# EAGLE board shield (EAGLE 6.4)
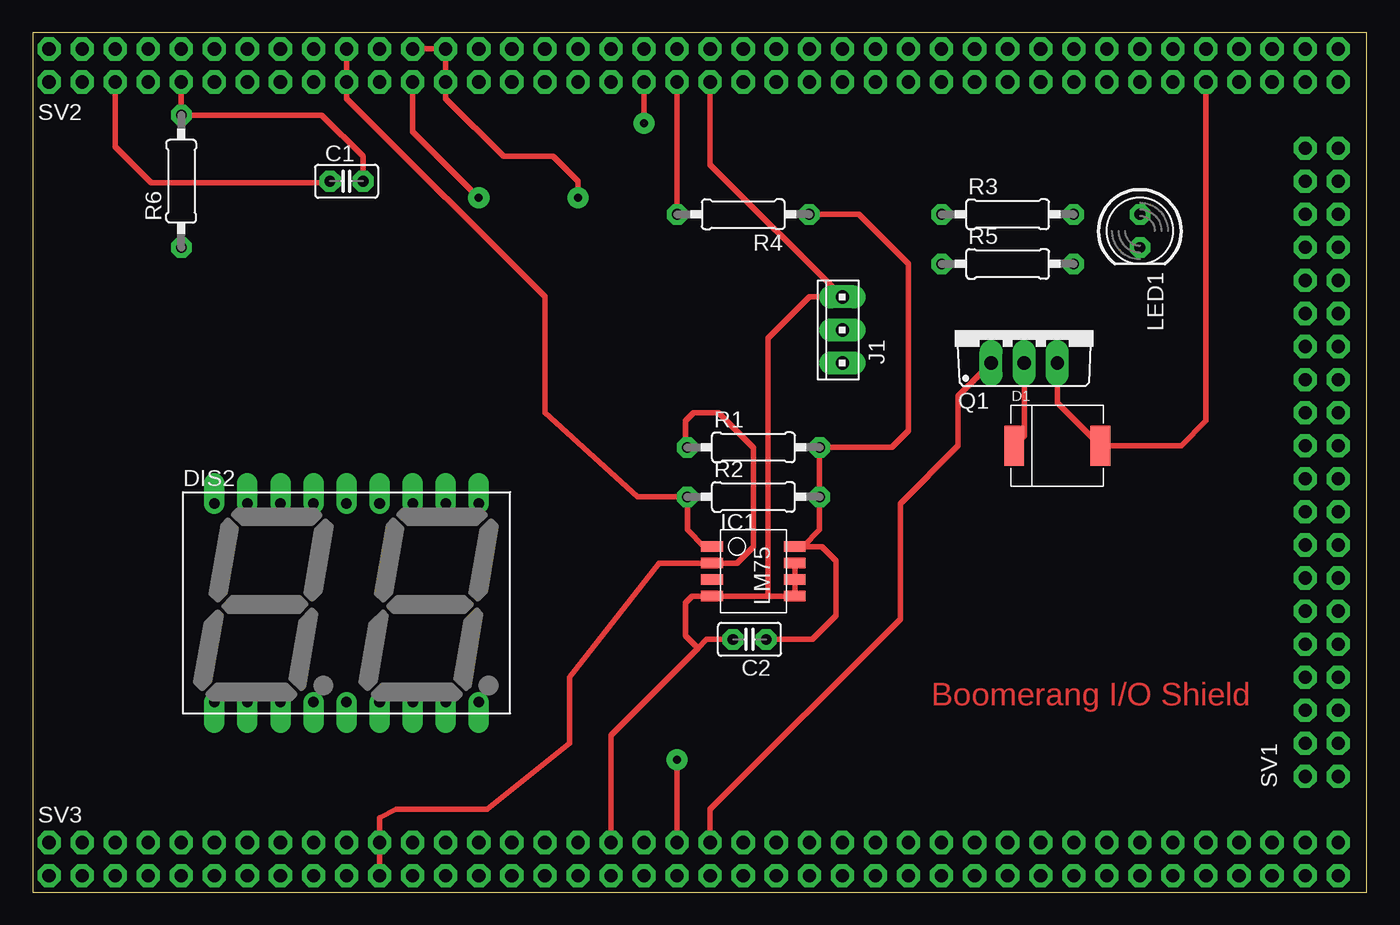
[diagram p0: board, top side]
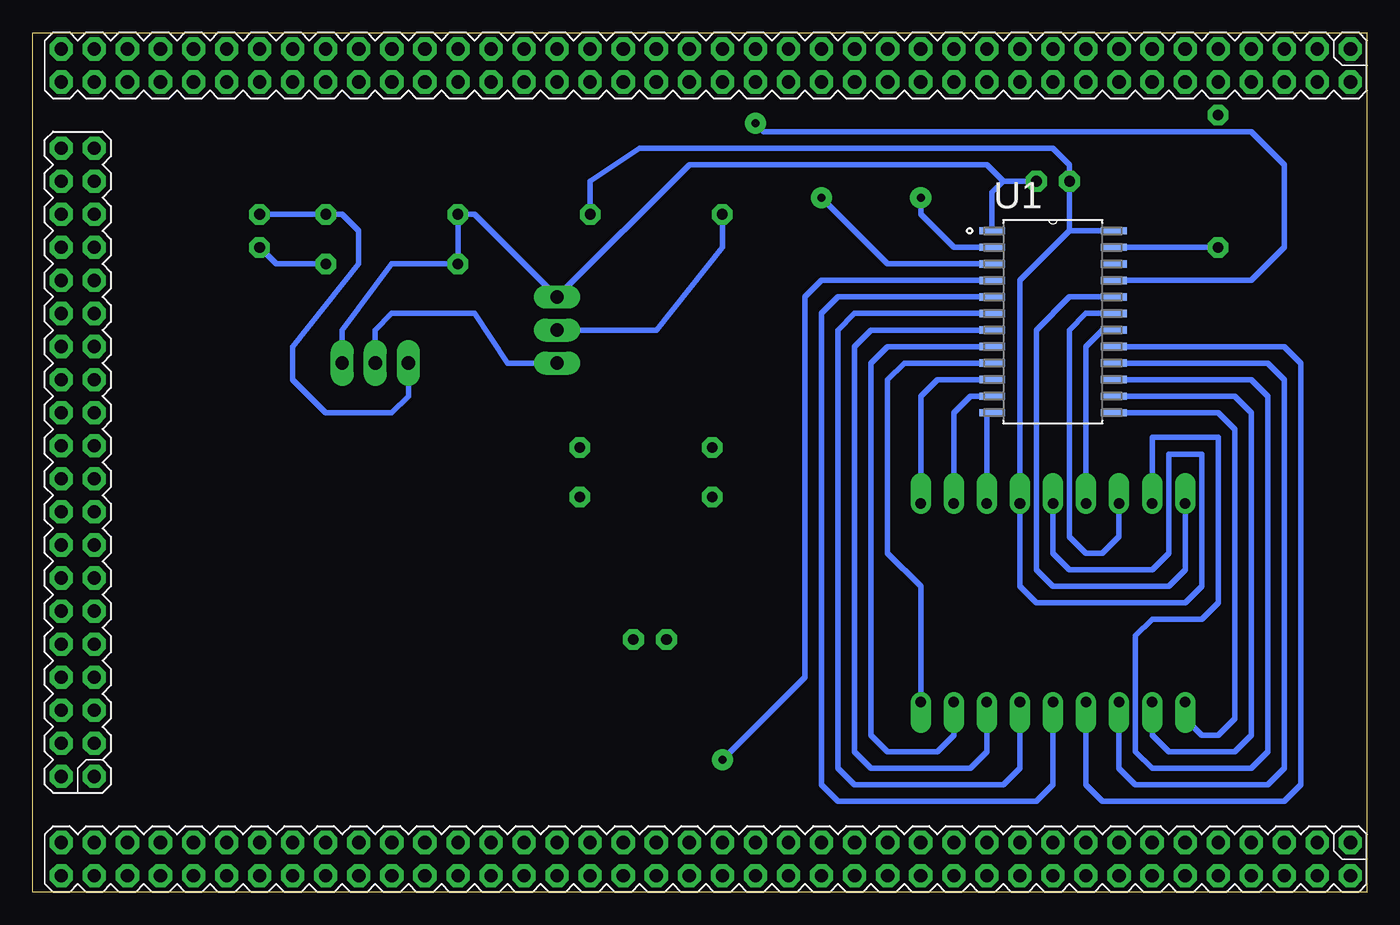
[diagram p1: board, bottom side, seen from below]

Size 102.54 x 66.03 mm. Coordinates in mm from the lower left corner, seen from the top.
Outline: 0,0 102.54,0 102.54,66.03 0,66.03 0,0
Copper layers (1*16): Top 0.035mm / dielectric 1.5mm / Bottom 0.035mm
Design rules "default *": minimum track width 10mil, minimum drill 10mil, track to track 12mil, track to pad 12mil, pad to pad 12mil, via to via 12mil, smd to smd 8mil, copper to edge 12mil, drill to drill 0.6mm, minimum pad ring 15mil, minimum via ring 20mil, stop-mask expansion 4mil, vias tented up to drill 0mil, thermal gap 10mil

## Footprints (pad centres in the part's own frame; a part is rotated, then mirrored left to right if it is on the bottom)
C2.5-2 = drill 0.813 pad 1.6 octagon: 1 -1.27,0; 2 1.27,0
DO214AB = smd 1.52 x 3.07: A 3.305,0; K -3.305,0
HDSP-R = drill 0.813 pad 1.016 offset: 1 -10.16,-7.62; 2 -7.62,-7.62; 3 -5.08,-7.62; 4 -2.54,-7.62; 5 0,-7.62; 6 2.54,-7.62; 7 5.08,-7.62; 8 7.62,-7.62; 9 10.16,-7.62; 10 10.16,7.62; 11 7.62,7.62; 12 5.08,7.62; 13 2.54,7.62; 14 0,7.62; 15 -2.54,7.62; 16 -5.08,7.62; 17 -7.62,7.62; 18 -10.16,7.62
SO8_LM75 = smd 0.813 x 1.676: 1 -1.27,-3.175; 2 0,-3.175; 3 1.27,-3.175; 4 2.54,-3.175; 5 2.54,3.175; 6 1.27,3.175; 7 0,3.175; 8 -1.27,3.175
10X03MTA = drill 1.016 long: 1 2.54,0; 2 0,0; 3 -2.54,0
LED5MM = drill 0.813 octagon: A -1.27,0; K 1.27,0
TO220BV = drill 1.016 long: D 0,-2.54; G -2.54,-2.54; S 2.54,-2.54
0207/10 = drill 0.813 octagon: 1 -5.08,0; 2 5.08,0
MA20-2 = drill 1.016 octagon: 1 -24.13,-1.27; 2 -24.13,1.27; 3 -21.59,-1.27; 4 -21.59,1.27; 5 -19.05,-1.27; 6 -19.05,1.27; 7 -16.51,-1.27; 8 -16.51,1.27; 9 -13.97,-1.27; 10 -13.97,1.27; 11 -11.43,-1.27; 12 -11.43,1.27; 13 -8.89,-1.27; 14 -8.89,1.27; 15 -6.35,-1.27; 16 -6.35,1.27; 17 -3.81,-1.27; 18 -3.81,1.27; 19 -1.27,-1.27; 20 -1.27,1.27; 21 1.27,-1.27; 22 1.27,1.27; 23 3.81,-1.27; 24 3.81,1.27; 25 6.35,-1.27; 26 6.35,1.27; 27 8.89,-1.27; 28 8.89,1.27; 29 11.43,-1.27; 30 11.43,1.27; 31 13.97,-1.27; 32 13.97,1.27; 33 16.51,-1.27; 34 16.51,1.27; 35 19.05,-1.27; 36 19.05,1.27; 37 21.59,-1.27; 38 21.59,1.27; 39 24.13,-1.27; 40 24.13,1.27
MA40-2 = drill 1.016 octagon: 1 -24.13,-1.27; 2 -24.13,1.27; 3 -21.59,-1.27; 4 -21.59,1.27; 5 -19.05,-1.27; 6 -19.05,1.27; 7 -16.51,-1.27; 8 -16.51,1.27; 9 -13.97,-1.27; 10 -13.97,1.27; 11 -11.43,-1.27; 12 -11.43,1.27; 13 -8.89,-1.27; 14 -8.89,1.27; 15 -6.35,-1.27; 16 -6.35,1.27; 17 -3.81,-1.27; 18 -3.81,1.27; 19 -1.27,-1.27; 20 -1.27,1.27; 21 1.27,-1.27; 22 1.27,1.27; 23 3.81,-1.27; 24 3.81,1.27; 25 6.35,-1.27; 26 6.35,1.27; 27 8.89,-1.27; 28 8.89,1.27; 29 11.43,-1.27; 30 11.43,1.27; 31 13.97,-1.27; 32 13.97,1.27; 33 16.51,-1.27; 34 16.51,1.27; 35 19.05,-1.27; 36 19.05,1.27; 37 21.59,-1.27; 38 21.59,1.27; 39 24.13,-1.27; 40 24.13,1.27; 41 26.67,-1.27; 42 26.67,1.27; 43 29.21,-1.27; 44 29.21,1.27; 45 31.75,-1.27; 46 31.75,1.27; 47 34.29,-1.27; 48 34.29,1.27; 49 36.83,-1.27; 50 36.83,1.27; 51 39.37,-1.27; 52 39.37,1.27; 53 41.91,-1.27; 54 41.91,1.27; 55 44.45,-1.27; 56 44.45,1.27; 57 46.99,-1.27; 58 46.99,1.27; 59 49.53,-1.27; 60 49.53,1.27; 61 52.07,-1.27; 62 52.07,1.27; 63 54.61,-1.27; 64 54.61,1.27; 65 57.15,-1.27; 66 57.15,1.27; 67 59.69,-1.27; 68 59.69,1.27; 69 62.23,-1.27; 70 62.23,1.27; 71 64.77,-1.27; 72 64.77,1.27; 73 67.31,-1.27; 74 67.31,1.27; 75 69.85,-1.27; 76 69.85,1.27; 77 72.39,-1.27; 78 72.39,1.27; 79 74.93,-1.27; 80 74.93,1.27
SOIC127P1030X265-24N = smd 1.981 x 0.559: 1 -4.674,6.985; 2 -4.674,5.715; 3 -4.674,4.445; 4 -4.674,3.175; 5 -4.674,1.905; 6 -4.674,0.635; 7 -4.674,-0.635; 8 -4.674,-1.905; 9 -4.674,-3.175; 10 -4.674,-4.445; 11 -4.674,-5.715; 12 -4.674,-6.985; 13 4.674,-6.985; 14 4.674,-5.715; 15 4.674,-4.445; 16 4.674,-3.175; 17 4.674,-1.905; 18 4.674,-0.635; 19 4.674,0.635; 20 4.674,1.905; 21 4.674,3.175; 22 4.674,4.445; 23 4.674,5.715; 24 4.674,6.985

## Placement (x,y rotation side)
C1  100n  [C2.5-2]  24.13,54.61 0 top
C2  100n  [C2.5-2]  55.09,19.41 180 top
D1  1.5SMCJ33A  [DO214AB]  78.74,34.29 0 top
DIS2  HDSP-521E  [HDSP-R]  24.13,22.23 0 top
IC1  LM75  [SO8_LM75]  55.4,25.28 270 top
J1  [10X03MTA]  62.23,43.18 90 top
LED1  [LED5MM]  85.09,50.8 270 top
Q1  IPP114N03L  [TO220BV]  76.2,43.18 0 top
R1  10k  [0207/10]  55.4,34.17 0 top
R2  10k  [0207/10]  55.4,30.36 0 top
R3  10k  [0207/10]  74.93,52.07 0 top
R4  10k  [0207/10]  54.61,52.07 180 top
R5  330  [0207/10]  74.93,48.26 0 top
R6  330R  [0207/10]  11.43,54.61 90 top
SV1  [MA20-2]  99.06,33.02 90 bottom
SV2  [MA40-2]  25.4,63.5 180 bottom
SV3  [MA40-2]  25.4,2.54 180 bottom
U1  TLC5925IDWR  [SOIC127P1030X265-24N]  24.13,43.81 0 bottom

## Library data of the parts
C1 C2 = capacitor-wima
D1 = seb
DIS2 = display-hp; OC_FARNELL: unknown; OC_NEWARK: unknown
IC1 = lm75
J1 = con-amp
LED1 = led
Q1 = transistor-power
R1-R6 = rcl
SV1-SV3 = boomerang; OC_FARNELL: unknown; OC_NEWARK: unknown
U1 = Texas Instruments_By_element14_Batch_1; MPN: TLC5925IDWR; OC_FARNELL: 1858096; OC_NEWARK: 10R6961; PACKAGE: SOIC-24; SUPPLIER: Texas Instruments

## Nets
+3V3: C1.1 C2.1 DIS2.13 DIS2.14 IC1.8 R1.2 R2.2 R4.1 SV2.6 U1.24
GND: C1.2 C2.2 D1.A IC1.4 IC1.5 IC1.6 IC1.7 J1.1 Q1.S R3.1 R5.1 R6.2 SV2.10 SV2.42 SV2.72 SV3.35 U1.1
N$1: DIS2.5 U1.5
N$2: DIS2.6 U1.6
N$3: DIS2.7 U1.7
N$4: DIS2.8 U1.8
N$5: DIS2.9 U1.9
N$6: DIS2.10 U1.10
N$7: DIS2.11 U1.11
N$8: DIS2.12 U1.12
N$9: DIS2.1 U1.13
N$10: DIS2.2 U1.14
N$11: DIS2.17 U1.15
N$12: DIS2.3 U1.16
N$13: DIS2.4 U1.17
N$14: DIS2.15 U1.18
N$15: DIS2.16 U1.19
N$16: DIS2.18 U1.20
N$17: D1.K J1.3 Q1.D
N$18: LED1.K R5.2
N$20: R6.1 U1.23
P8: SV2.3
P13: SV3.8
P14: SV2.8
P15: SV3.7
P16: SV2.7
P17: SV3.10
P19: SV3.9
P20: SV2.9
P21: SV3.12
P22: SV2.12
P23: SV3.11
P24: SV2.11
P25: SV3.14
P27: SV3.13
P28: SV2.13
P29: SV3.16
P30: SV2.16
P31: SV3.15
P33: SV3.18
P34: SV2.18
P35: SV3.17
P36: SV2.17
P37: SV3.20
P38: SV2.20
P40: IC1.1 R2.1 SV2.19
P41: IC1.2 R1.1 SV3.22
P42: SV2.22
P43: SV3.21
P44: SV2.21
P45: SV3.24
P46: SV2.24 U1.2
P47: SV3.23
P48: SV2.23 U1.3
P49: SV3.26
P51: SV3.25
P52: SV2.25
P53: SV3.28
P54: SV2.28
P55: SV3.27
P56: SV2.27
P57: SV3.30
P59: SV3.29
P60: SV2.29
P61: SV3.32
P62: SV2.32
P63: SV3.31
P64: SV2.31
P65: SV3.34
P66: SV2.34
P67: SV3.33
P68: SV2.33
P69: SV3.36
P70: SV2.36
P72: SV2.35
P73: SV3.38
P74: SV2.38 U1.21
P75: SV3.37
P76: SV2.37
P77: SV3.40
P78: J1.2 R4.2 SV2.40
P79: SV3.39 U1.4
P80: SV2.39
P81: SV3.42
P83: LED1.A Q1.G R3.2 SV3.41
P84: SV2.41
P85: SV3.44
P86: SV2.44
P87: SV3.43
P89: SV3.46
P90: SV2.46
P91: SV3.45
P92: SV2.45
P93: SV3.48
P95: SV3.47
P96: SV2.47
P97: SV3.50
P98: SV2.50
P99: SV3.49
P100: SV2.49
P101: SV3.52
P103: SV3.51
P104: SV2.51
P105: SV3.54
P106: SV2.54
P107: SV3.53
P108: SV2.53
P109: SV3.56
P110: SV2.56
P112: SV2.55
P113: SV3.58
P114: SV2.58
P115: SV3.57
P117: SV3.60
P118: SV2.60
P119: SV3.59
P120: SV2.59
P121: SV3.62
P122: SV2.62
P123: SV3.61
P124: SV2.61
P125: SV3.64
P126: SV2.64
P127: SV3.63
P128: SV2.63
P130: SV2.66
P131: SV3.65
P132: SV2.65
P133: SV3.68
P134: SV2.68
P135: SV3.67
P136: SV2.67
P137: SV3.70
P138: SV2.70
P139: SV3.69
P140: SV2.69
P141: SV3.72
P143: SV3.71
P144: SV2.71
P145: SV3.74
P146: SV2.74
P148: SV2.73
P149: SV3.76
P150: SV2.76
P151: SV3.75
P152: SV2.75
P153: SV3.78
P154: SV2.78
P155: SV3.77
P156: SV2.77
P157: SV3.80
P158: SV2.80
P159: SV3.79
P161: SV1.2
P162: SV1.39
P163: SV1.1
P164: SV1.40
P165: SV1.4
P166: SV1.37
P167: SV1.3
P168: SV1.38
P169: SV1.6
P170: SV1.35
P172: SV1.36
P173: SV1.8
P174: SV1.33
P175: SV1.7
P176: SV1.34
P177: SV1.10
P178: SV1.31
P179: SV1.9
P180: SV1.32
P181: SV1.12
P182: SV1.29
P184: SV1.30
P185: SV1.14
P186: SV1.27
P187: SV1.13
P188: SV1.28
P189: SV1.16
P190: SV1.25
P191: SV1.15
P192: SV1.26
P193: SV1.18
P194: SV1.23
P195: SV1.17
P196: SV1.24
P197: SV1.20
P198: SV1.21
P199: SV1.19

## Tracks (layer width: path | path; a pad name or v marks a point on that pad's centre or on a via)
+3V3
  Top 0.406: R4.1 63.5,52.07 67.31,48.26 67.31,35.44 66.04,34.17 R1.2 R2.2 60.48,27.82 59.21,26.55 IC1.8 60.66,26.55 61.75,25.46 61.75,21.23 59.93,19.41 C2.1 | C1.1 22.74,54.49 9.13,54.49 6.35,57.27 SV2.6
  Bottom 0.406: 22.86,50.8 C1.1 22.86,55.88 24.13,57.15 55.88,57.15 59.69,54.61 R4.1 | U1.24 22.86,50.8 | 22.86,50.8 26.67,46.99 DIS2.13 26.67,23.49 25.4,22.23 13.97,22.23 12.7,23.49 12.7,33.66 15.24,33.66 15.24,26.04 16.51,24.77 22.86,24.77 24.13,26.04 DIS2.14
GND
  Top 0.406: 56.52,22.74 IC1.4 50.68,22.74 50.17,22.23 50.17,19.68 51.12,18.73 | 56.52,22.74 IC1.5 IC1.6 IC1.7 | Q1.S 78.74,37.59 D1.A 88.27,34.29 90.17,36.2 SV2.72 | SV2.10 R6.2 22.22,59.69 25.4,56.51 C1.2 | SV2.42 52.07,55.88 J1.1 59.69,45.72 56.52,42.55 56.52,22.74 | C2.2 51.8,19.41 51.12,18.73 | 51.12,18.73 44.45,12.07 SV3.35
  Bottom 0.406: U1.1 28.8,53.75 27.94,54.61 | C1.2 27.94,54.61 | 27.94,54.61 29.21,55.88 52.07,55.88 J1.1 68.58,52.07 R3.1 R5.1 74.93,48.26 78.74,43.18 Q1.S
N$1
  Bottom 0.406: U1.5 40.64,45.72 41.91,44.45 41.91,8.25 40.64,6.98 25.4,6.98 24.13,8.25 DIS2.5
N$2
  Bottom 0.406: U1.6 39.37,44.45 40.64,43.18 40.64,9.52 39.37,8.25 27.94,8.25 26.67,9.52 DIS2.6
N$3
  Bottom 0.406: U1.7 38.1,43.18 39.37,41.91 39.37,10.8 38.1,9.52 30.48,9.52 29.21,10.8 DIS2.7
N$4
  Bottom 0.406: U1.8 36.83,41.91 38.1,40.64 38.1,12.07 36.83,10.8 33.02,10.8 31.75,12.07 DIS2.8
N$5
  Bottom 0.406: U1.9 35.56,40.64 36.83,39.37 36.83,26.04 34.29,23.49 DIS2.9
N$6
  Bottom 0.406: U1.10 33.02,39.37 34.29,38.1 DIS2.10
N$7
  Bottom 0.406: U1.11 30.48,38.1 31.75,36.83 DIS2.11
N$8
  Bottom 0.406: U1.12 29.21,36.83 DIS2.12
N$9
  Bottom 0.406: DIS2.1 13.97,13.34 12.7,12.07 11.43,12.07 10.16,13.34 10.16,35.56 11.43,36.83 U1.13
N$10
  Bottom 0.406: DIS2.2 16.51,12.07 15.24,10.8 10.16,10.8 8.89,12.07 8.89,36.83 10.16,38.1 U1.14
N$11
  Bottom 0.406: U1.15 8.89,39.37 7.62,38.1 7.62,10.8 8.89,9.52 16.51,9.52 17.78,10.8 17.78,19.68 16.51,20.95 12.7,20.95 11.43,22.23 11.43,34.92 16.51,34.92 DIS2.17
N$12
  Bottom 0.406: DIS2.3 19.05,9.52 17.78,8.25 7.62,8.25 6.35,9.52 6.35,39.37 7.62,40.64 U1.16
N$13
  Bottom 0.406: DIS2.4 21.59,8.25 20.32,6.98 6.35,6.98 5.08,8.25 5.08,40.64 6.35,41.91 U1.17
N$14
  Bottom 0.406: U1.18 20.32,43.18 21.59,41.91 DIS2.15
N$15
  Bottom 0.406: U1.19 21.59,44.45 22.86,43.18 22.86,27.3 21.59,26.04 20.32,26.04 19.05,27.3 DIS2.16
N$16
  Bottom 0.406: DIS2.18 13.97,24.77 15.24,23.49 24.13,23.49 25.4,24.77 25.4,43.18 22.86,45.72 U1.20
N$17
  Top 0.406: Q1.D 76.2,35.05 D1.K
  Bottom 0.406: Q1.D 76.2,43.18 74.93,44.45 68.58,44.45 66.04,40.64 J1.3
N$18
  Bottom 0.406: R5.2 83.82,48.26 LED1.K
N$19  (via drill 0.6)
  other vias: 46.99,59.05
N$20
  Bottom 0.406: R6.1 U1.23
P40
  Top 0.406: IC1.1 51.59,26.55 50.32,27.82 R2.1 46.51,30.36 39.37,36.83 39.37,45.72 24.13,60.96 SV2.19
P41
  Top 0.406: SV3.22 26.67,5.71 27.94,6.35 34.93,6.35 41.28,11.43 41.28,16.51 48.14,25.28 IC1.2 54.13,25.28 55.4,26.55 55.4,34.14 52.71,36.83 50.8,36.83 50.17,36.2 50.17,34.32 R1.1
P46  (via drill 0.61)
  Top 0.406: SV2.24 29.21,58.42 v34.29,53.34
  Bottom 0.406: U1.2 31.75,49.53 34.29,52.07 v34.29,53.34
P48  (via drill 0.61)
  Top 0.406: v41.91,53.34 41.91,54.61 40.01,56.51 36.2,56.51 31.75,60.96 31.75,64.77 SV2.23
  Bottom 0.406: U1.3 36.83,48.26 v41.91,53.34
P74  (1 unrouted)
  Top 0.406: SV2.38 46.99,59.05
  Bottom 0.406: U1.21 8.89,46.99 6.35,49.53 6.35,55.88 8.89,58.42 46.36,58.42 46.99,59.05
P78
  Top 0.406: SV2.40 R4.2
  Bottom 0.406: J1.2 54.61,43.18 49.53,49.53 R4.2
P79  (via drill 0.61)
  Top 0.406: v49.53,10.16 SV3.39
  Bottom 0.406: v49.53,10.16 43.18,16.51 43.18,45.72 41.91,46.99 U1.4
P83
  Top 0.406: SV3.41 52.07,6.35 66.67,20.95 66.67,29.84 71.12,34.29 71.12,38.1 Q1.G
  Bottom 0.406: LED1.A R3.2 78.74,52.07 77.47,50.8 77.47,48.26 82.55,41.91 82.55,39.37 80.01,36.83 74.93,36.83 73.66,38.1 Q1.G

## Text on the board
Top: Boomerang I/O Shield